# Altium PCB v2下.PcbDoc final.PcbDoc
Units mil, origin at the board's own origin, x right, y up, seen from the top; angles counter-clockwise.
Board outline 3795.04 x 3784.75 mil, 2 copper layers (Top Layer, Bottom Layer); 11 components, 13 nets, 108 pads, 1 vias.
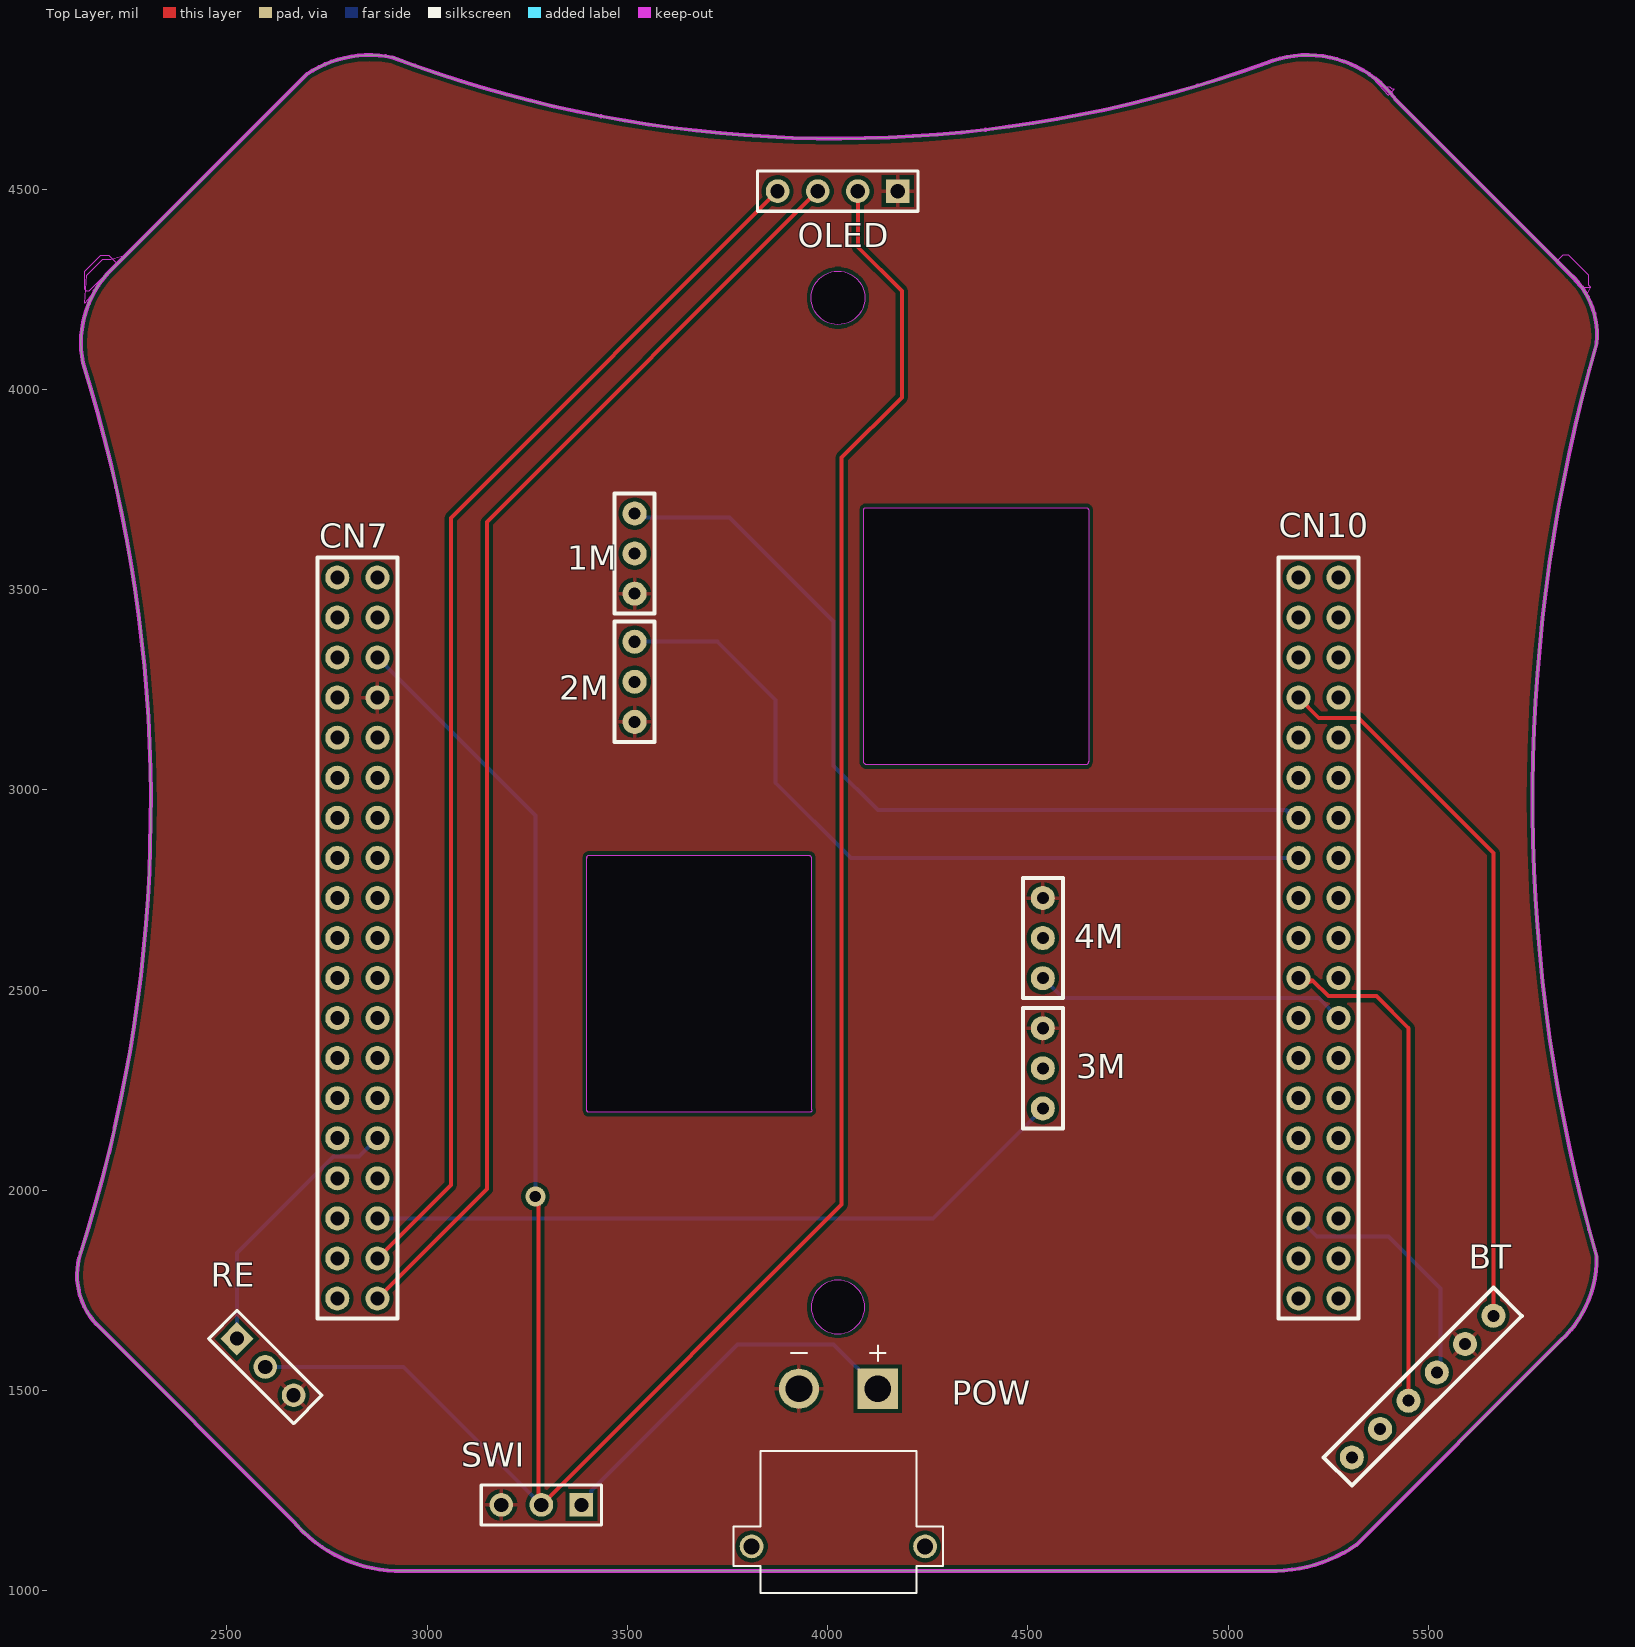
[diagram p0: Top Layer view]
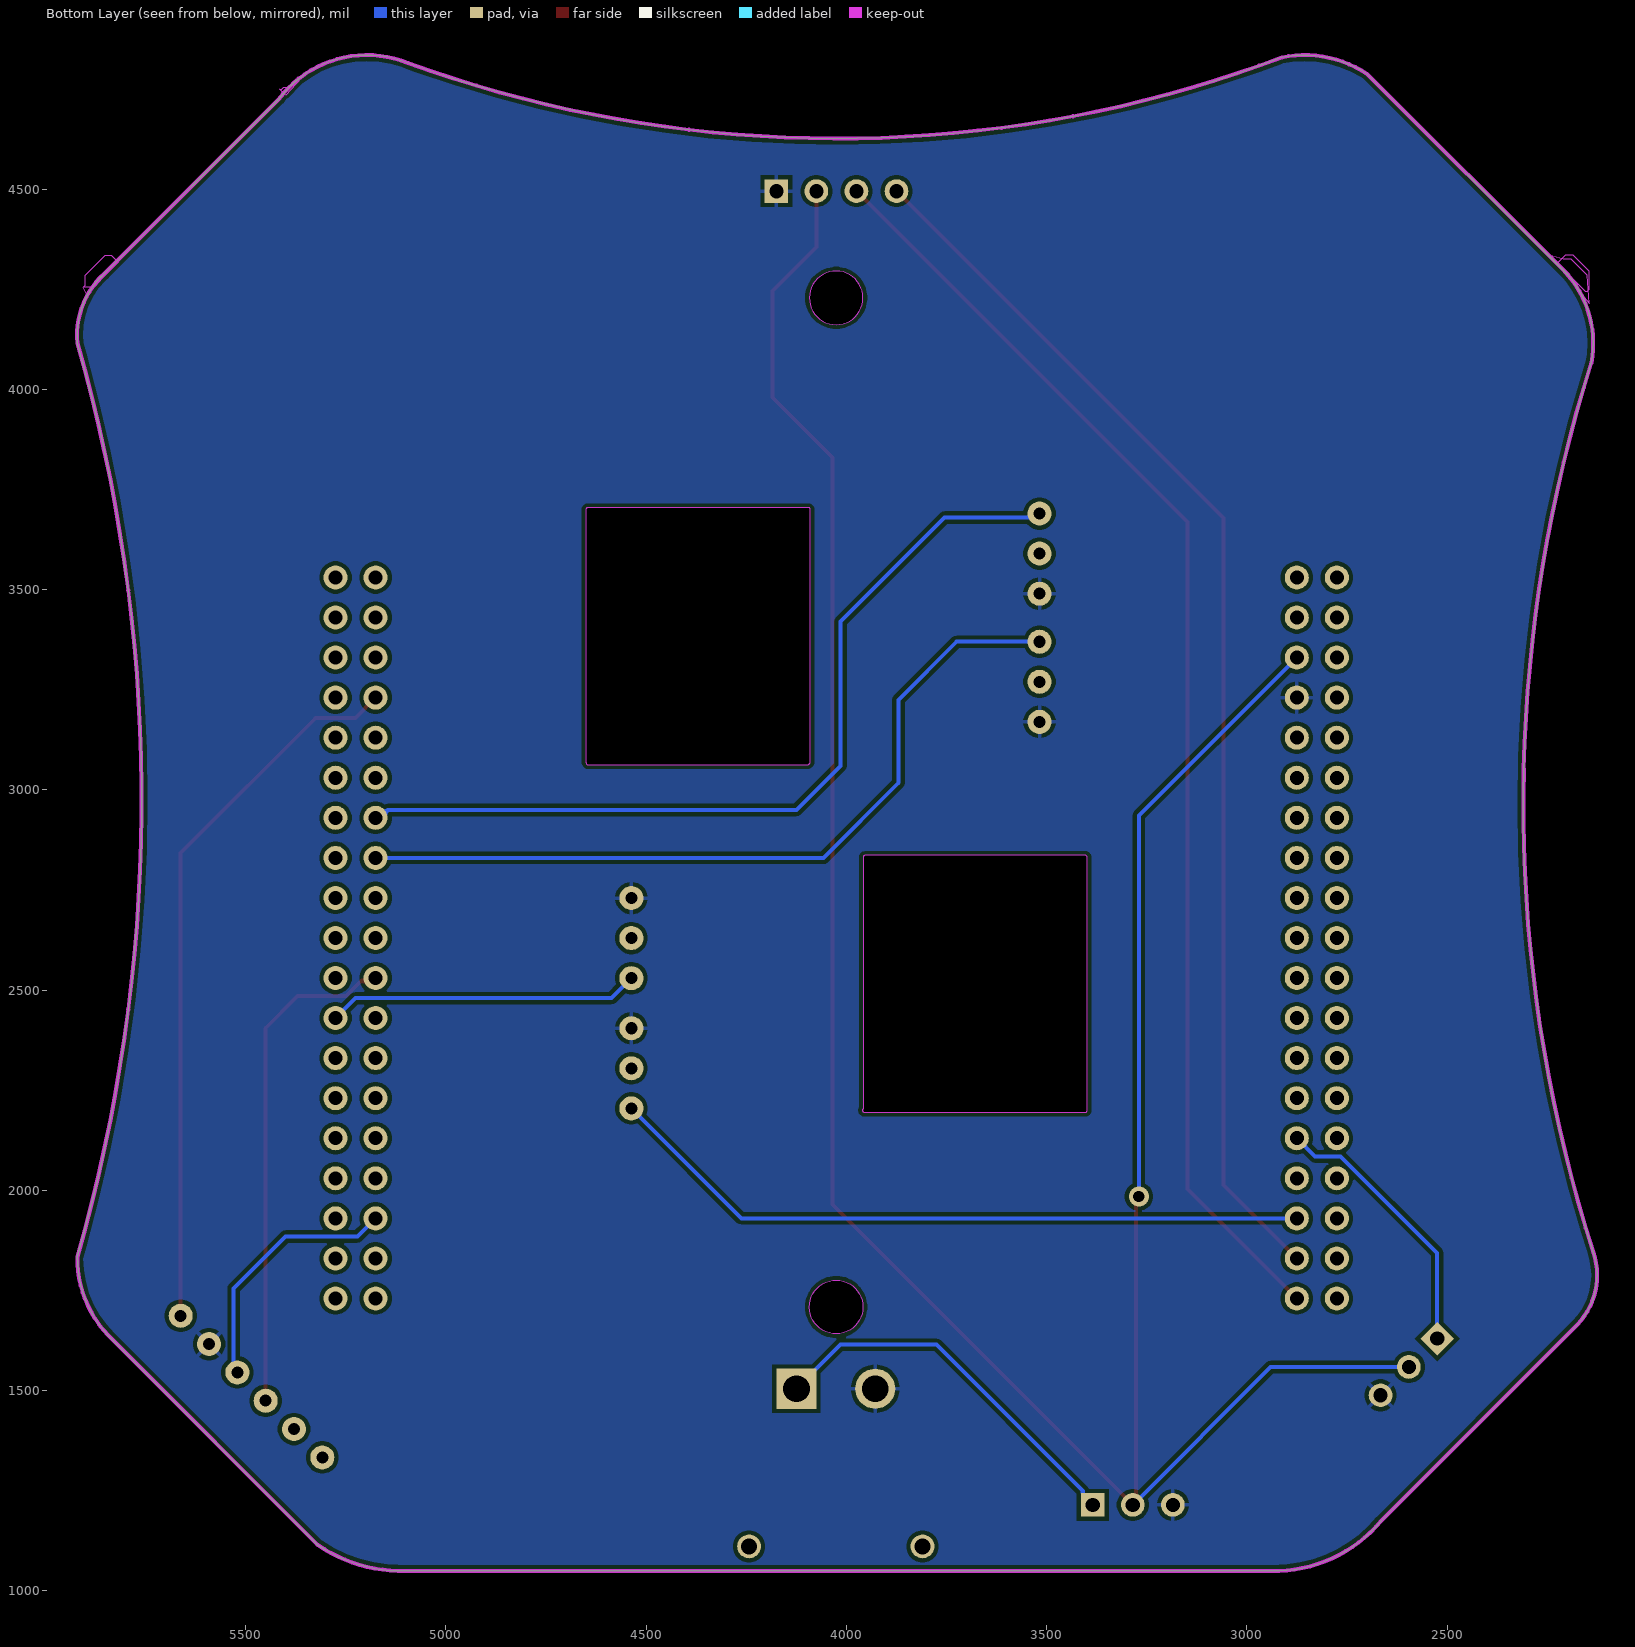
[diagram p1: Bottom Layer view, seen from below]

## Layer stack, top to bottom
Top Solder: solder mask 0.4, Solder Resist, Dk 3.5
Top Layer: signal copper 1.4
Dielectric 1: dielectric 12.6, FR-4, Dk 4.8
Bottom Layer: signal copper 1.4
Bottom Solder: solder mask 0.4, Solder Resist, Dk 3.5

## Board outline
2175,1665 cw(c2305.32,1788.4) 2135,1845 ccw(c-1354.31,2963.88) 2140.23,4066.32 cw(c2397.72,4115.4) 2199.01,4286.35 2700,4787.35 cw(c2856.21,4553.38) 2913.13,4828.88 ccw(c4022.81,7768.2) 5095,4815 cw(c5197.36,4559.91) 5417.63,4724.32 5852.5,4289.45 cw(c5712.52,4135) 5920,4115 ccw(c9898.44,2975) 5920,1835 cw(c5639.93,1830.74) 5830,1625 5320,1115 cw(c5110.22,1420.3) 5120,1050 2920,1050 cw(c2932.81,1398.73) 2665,1175
cut-out: 2145,4215 2150,4285 2190,4325 2210,4325 2245,4335
cut-out: 2150,4245 2145,4250 2145,4295 2185,4335 2205,4335 2225,4315 2155,4245
cut-out: 3398.8,2200.08 3398.8,2828.82 cw(c3403.82,2828.82) 3399.01,2830.24 cw(c3403.82,2831.65) 3403.82,2836.67 3953.35,2836.67 cw(c3953.35,2831.65) 3958.36,2831.65 3958.36,2203.87 cw(c3955.08,2200.08) 3960.09,2200.08 cw(c3955.08,2200.08) 3955.08,2195.06 3405,2195.06 cw(c3405,2200.08) 3404.41,2195.1 cw(c3403.82,2200.08)
cut-out: 4092.71,3065.5 cw(c4095.08,3069.92) 4090.06,3069.92 4090.06,3699.92 cw(c4095.08,3699.92) 4095.08,3704.94 4645.08,3704.94 cw(c4645.08,3699.92) 4649.13,3702.87 cw(c4646.18,3698.82) 4651.2,3698.82 4651.2,3071.18 cw(c4646.18,3071.18) 4650.01,3067.95 cw(c4645.64,3067.88) 4650.02,3067.87 cw(c4645,3067.87) 4645,3062.86 4097.13,3062.86 cw(c4097.13,3067.87)
cut-out: 4025.61,4161.69 cw(c4025.61,4228.62) 3958.68,4228.62 cw(c4025.61,4228.62) 4025.61,4295.55 cw(c4025.61,4228.62) 4092.54,4228.62 cw(c4025.61,4228.62)
cut-out: 3958.68,1708.93 ccw(c4025.61,1708.93) 4025.61,1642.01 ccw(c4025.61,1708.93) 4092.54,1708.93 ccw(c4025.61,1708.93) 4025.61,1775.86 ccw(c4025.61,1708.93)
cut-out: 5820,4320 5895,4235 5905,4255 5900,4260 5900,4285 5850,4335 5835,4335
cut-out: 5817.5,4317.5 5880,4255 5905,4255 5900,4260 5900,4285 5850,4335 5835,4335
cut-out: 5820,4320 5885,4255 5905,4255 5900,4260 5900,4285 5850,4335 5835,4335
cut-out: 5348.39,4790.26 5400,4735 5404.83,4739.83 5414.83,4749.83 5409.83,4749.83 5404.83,4754.83 5394.83,4754.83

## Design rules (kind name [scope] priority, off if disabled: settings)
Clearance [All] p1: gap=10 ignorepadtopadclearanceinfootprint=FALSE except(0: Arc-Hole Track-Hole SMDPad-Hole THPad-Hole Via-Hole Fill-Hole Poly-Hole Region-Hole Text-Hole)
PolygonConnect [All] p1: connectstyle=Relief reliefconductorwidth=10 reliefentries=4 polygonreliefangle="90 Angle" airgapwidth=10
RoutingVias [All] p1: holewidth=28 width=50 viastyle="Through Hole" minholewidth=28 minwidth=50 maxholewidth=28 maxwidth=50
SolderMaskExpansion [All] p1: expansion=4 istentingtop=FALSE
Width [All] p1: maxlimit=10 minlimit=10 preferedwidth=10
30 further rules are at their usual default settings.

## Classes and differential pairs
component class v2下: CN7 OLED RE SWI

## Components (designator, comment, footprint, x,y, rotation, side; value= is the part's Value field where it differs from the comment)
1 "CN10" CN10 5275.61,1730.39 r0 top
1 "M" M 3517.95,3690 r0 top
2 "M" M 3517.95,3370 r0 top
3 "M" M 4537.05,2205 r180 top
4 "M" M 4537.05,2530 r180 top
BT "Bluetooth" Bluetooth 5308.58,1333.58 r135 top
CN7 "CN7" CN7 2775.61,1730.39 r0 top
OLED "OLED" HDR1X4 4175,4495 r180 top
POW "XT30PW-M" AMASS_XT30PW-M 4026.57,1111.3 r180 top (schematic designator PO)
RE "RECEIVE" HDR1X3 2525,1630 r315 top
SWI "SWITCH" HDR1X3 3385,1215 r180 top

## Footprints (in the part's own frame and the unit in brackets; to place one, negate y for a bottom-side part, rotate by r counter-clockwise, add the part's x,y. Pads: shape width x height; smd on the part's side, far side on the other; paste and mask are expansions set on the pad)
AMASS_XT30PW-M [mm]
  round 2.55 hole 1.7: N(2.5,-10)
  rect 2.55x2.55 / inner round 2.55 / far side rect 2.55x2.55 hole 1.7: P(-2.5,-10)
  round 1.508 hole 1: S1(5.5,0) S2(-5.5,0)
  silkscreen extent -6.65,-12.75 6.65,2.95, body extent -6.65,-11 6.65,2.95, height 5
Bluetooth [mil]
  round 60 hole 30: 1(0,0) 2(0,-100) 3(0,-200) 4(0,-300) 5(0,-400) 6(0,-500)
  silkscreen extent -50,-550 50,50
CN7 [mil]
  round 60 hole 35: 1(0,1800) 2(100,1800) 3(0,1700) 4(100,1700) 5(0,1600) 6(100,1600) 7(0,1500) 8(100,1500) 9(0,1400) 10(100,1400) 11(0,1300) 12(100,1300) 13(0,1200) 14(100,1200) 15(0,1100) 16(100,1100) 17(0,1000) 18(100,1000) 19(0,900) 20(100,900) 21(0,800) 22(100,800) 23(0,700) 24(100,700) 25(0,600) 26(100,600) 27(0,500) 28(100,500) 29(0,400) 30(100,400) 31(0,300) 32(100,300) 33(0,200) 34(100,200) 35(0,100) 36(100,100) 37(0,0) 38(100,0)
  silkscreen extent -50,-50 150,1850
CN10 [mil]
  round 60 hole 35: 1(-100,1800) 2(0,1800) 3(-100,1700) 4(0,1700) 5(-100,1600) 6(0,1600) 7(-100,1500) 8(0,1500) 9(-100,1400) 10(0,1400) 11(-100,1300) 12(0,1300) 13(-100,1200) 14(0,1200) 15(-100,1100) 16(0,1100) 17(-100,1000) 18(0,1000) 19(-100,900) 20(0,900) 21(-100,800) 22(0,800) 23(-100,700) 24(0,700) 25(-100,600) 26(0,600) 27(-100,500) 28(0,500) 29(-100,400) 30(0,400) 31(-100,300) 32(0,300) 33(-100,200) 34(0,200) 35(-100,100) 36(0,100) 37(-100,0) 38(0,0)
  silkscreen extent -150,-50 50,1850
HDR1X3 [mm] "Connector; Header; 3 Position"
  rect 1.5x1.5 hole 0.9: 1(0,0)
  round 1.5 hole 0.9: 2(2.54,0) 3(5.08,0)
  silkscreen extent -1.27,-1.27 6.35,1.27
HDR1X4 [mm] "Connector; Header; 4 Position"
  rect 1.5x1.5 hole 0.9: 1(0,0)
  round 1.5 hole 0.9: 2(2.54,0) 3(5.08,0) 4(7.62,0)
  silkscreen extent -1.27,-1.27 8.89,1.27
M [mil]
  round 60 hole 30: 1(0,0) 2(0,-100) 3(0,-200)
  silkscreen extent -50,-250 50,50

## Part data
OLED: library part "Header 4", "Header, 4-Pin"
POW: "Socket; DC supply; XT30; male; PIN: 2; on PCBs; THT; Colour: yellow"
RE SWI: library part "Header 3", "Header, 3-Pin"

## Via types
v1: diameter 50, hole 28, Top Layer to Bottom Layer, 1 vias

## Nets (pads, with @x,y where several pads share a name; then routed paths per layer and width w, separated by ;. In a path a pad name is that pad's centre, name@x,y a point inside that pad or via, vN(x,y) a via of type N, cw(c..) or ccw(c..) an arc to the next point about the centre after c; other vN are vias at no path point)
3V3: 1.7 BT.6 | length 1802.8
  Top Layer w10: 1.7 5226,3180 5325,3180 5662.13,2842.87 BT.6
5V: CN7.6 OLED.2 RE.2 SWI.2 | length 6825
  Top Layer w10: CN7.6@2875.61,3320.61 CN7.6 ; v1(3270,1985) 3277.5,1977.5 3277.5,1222.5 SWI.2 4035,1965 4035,3830 4185,3980 4185,4245.94 4075,4355.94 OLED.2
  Bottom Layer w10: RE.2 2940.71,1559.29 SWI.2 ; CN7.6 3270,2936 v1(3270,1985)
GND: 1.3@3517.95,3490 2.3 3.3 4.3 BT.5 CN7.8 OLED.1 POW.N RE.3 SWI.3 | length 24.5
  Bottom Layer w10: POW.N@3928.15,1480.54 POW.N
P: POW.P SWI.1 | length 957.1
  Bottom Layer w10: SWI.1 3409.53,1239.53 3409.53,1249.53 3775,1615 4015,1615 POW.P
PA1: CN7.30 RE.1 | length 682.9
  Bottom Layer w10: RE.1 2525,1843.42 2766.51,2084.93 2830.15,2084.93 CN7.30
PA6: 1.1@3517.95,3690 1.13 | length 2183.2
  Bottom Layer w10: 1.1@3517.95,3690 3527.52,3680.43 3548.38,3680.43 3548.81,3680 3755,3680 4015,3420 4015,3060 4125,2950 5144.75,2950 5164.36,2930.39 1.13
PA7: 1.15 2.1 | length 2002.5
  Bottom Layer w10: 2.1 3725,3370 3870,3225 3870,3017.95 4057.56,2830.39 1.15
PA9: 1.21 BT.3 | length 1256.3
  Top Layer w10: 1.21 5182.93,2523.07 5211.93,2523.07 5250,2485 5370,2485 5450,2405 BT.3
PA10: 1.33 BT.4 | length 640.2
  Bottom Layer w10: 1.33 5221,1885 5400,1885 5530,1755 5530,1555 BT.4
PB0: 3.1 CN7.34 | length 1775.2
  Bottom Layer w10: CN7.34 4262.44,1930.39 3.1
PB1: 1.24 4.1 | length 779.8
  Bottom Layer w10: 4.1 4587.05,2480 5226,2480 1.24
PC0: CN7.38 OLED.3 | length 3220
  Top Layer w10: CN7.38 3149,2003.78 3149,3669 OLED.3
PC1: CN7.36 OLED.4 | length 3078.6
  Top Layer w10: CN7.36 3059,2013.78 3059,3679 OLED.4
pads on no net: 1.1@5175.61,3530.39 1.2 1.3@5175.61,3430.39 1.4 1.5 1.6 1.8 1.9 1.10 1.11 1.12 1.14 1.16 1.17 1.18 1.19 1.20 1.22 1.23 1.25 1.26 1.27 1.28 1.29 1.30 1.31 1.32 1.34 1.35 1.36 1.37 1.38 2.2 3.2 4.2 BT.1 BT.2 CN7.1 CN7.2 CN7.3 CN7.4 CN7.5 CN7.7 CN7.9 CN7.10 CN7.11 CN7.12 CN7.13 CN7.14 CN7.15 CN7.16 CN7.17 CN7.18 CN7.19 CN7.20 CN7.21 CN7.22 CN7.23 CN7.24 CN7.25 CN7.26 CN7.27 CN7.28 CN7.29 CN7.31 CN7.32 CN7.33 CN7.35 CN7.37 POW.S1 POW.S2

## Polygon pours and split planes (outlines as drawn)
GND on Bottom Layer "NONET_L-01_P-001" (solid, remove dead copper, pour order 5): 2175,1665 cw(c2352.34,1793.43) 2135,1820 2135,4165 cw(c2344.47,4132.07) 2199.01,4286.35 2700,4787.35 cw(c2856.21,4553.38) 2913.13,4828.88 ccw(c4022.81,7768.2) 5095,4815 cw(c5197.36,4559.91) 5417.63,4724.32 5852.5,4289.45 cw(c5712.52,4135) 5920,4115 5920,1835 cw(c5639.93,1830.74) 5830,1625 5320,1115 cw(c5110.22,1420.3) 5120,1050 2920,1050 cw(c2932.81,1398.73) 2665,1175
GND on Top Layer "GND_L01_P004" (solid, remove dead copper, pour order 4): 2175,1665 cw(c2352.34,1793.43) 2135,1820 2135,4165 cw(c2344.47,4132.07) 2199.01,4286.35 2700,4787.35 cw(c2856.21,4553.38) 2913.13,4828.88 ccw(c4022.81,7768.2) 5095,4815 cw(c5197.36,4559.91) 5417.63,4724.32 5852.5,4289.45 cw(c5712.52,4135) 5920,4115 5920,1835 cw(c5639.93,1830.74) 5830,1625 5320,1115 cw(c5110.22,1420.3) 5120,1050 2920,1050 cw(c2932.81,1398.73) 2665,1175

## Keep-outs
Keep-Out Layer:
  the board outline again, w10

## Text inside footprints (layer, text, board x,y; h text height)
1: Top Overlay "1M" at 3350,3550 h60
2: Top Overlay "2M" at 3330,3225 h60
3: Top Overlay "3M" at 4620,2280 h60
4: Top Overlay "4M" at 4615,2605 h60